# Altium PCB PCB.PcbDoc
Units mil, origin at the board's own origin, x right, y up, seen from the top; angles counter-clockwise.
Board outline 5065 x 3485 mil, 2 copper layers (Top Layer, Bottom Layer); 32 components, 28 nets, 114 pads, 0 vias.
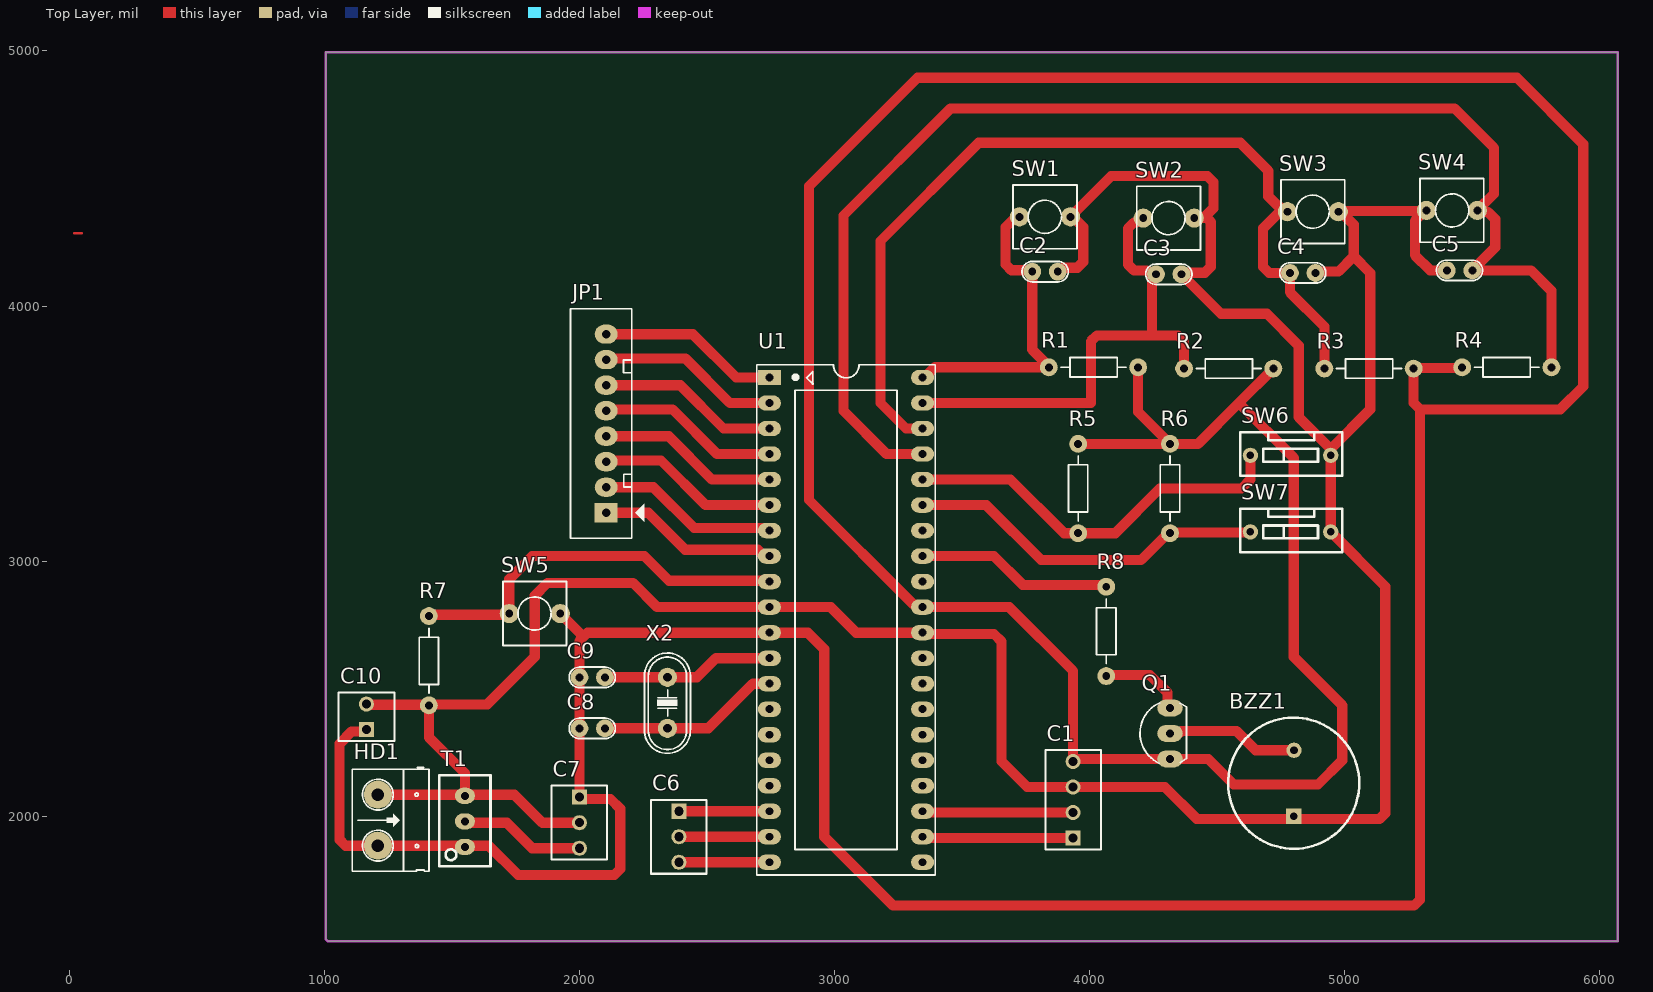
[diagram p0: Top Layer view]
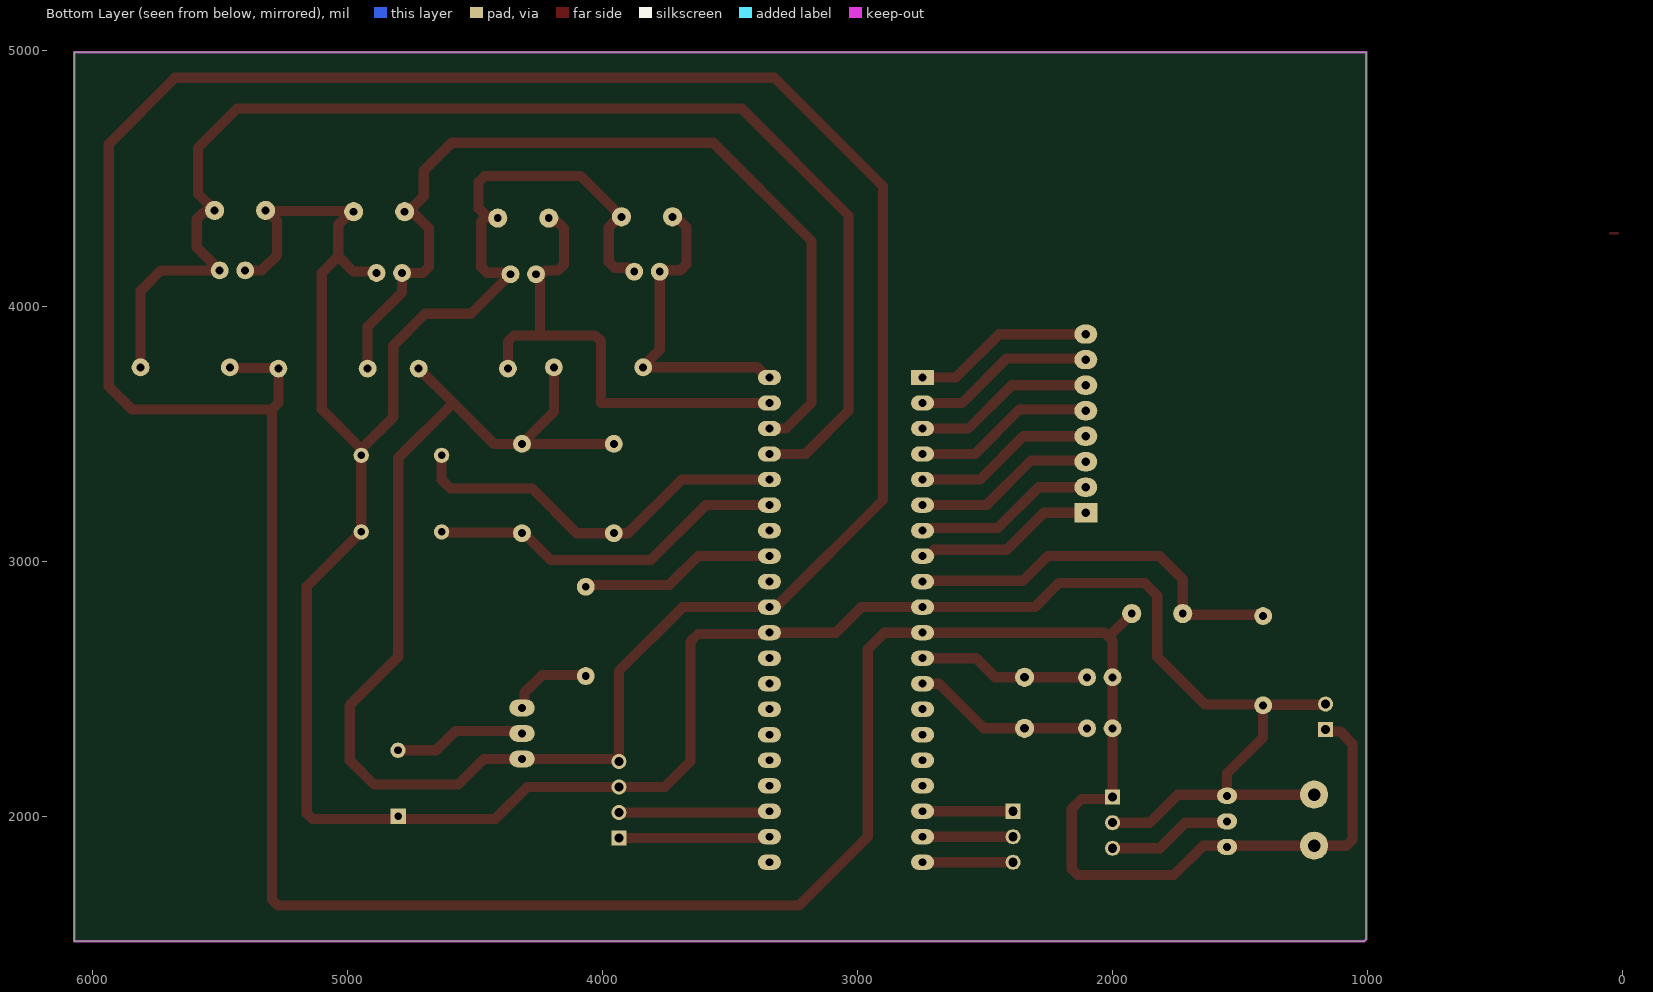
[diagram p1: Bottom Layer view, seen from below]
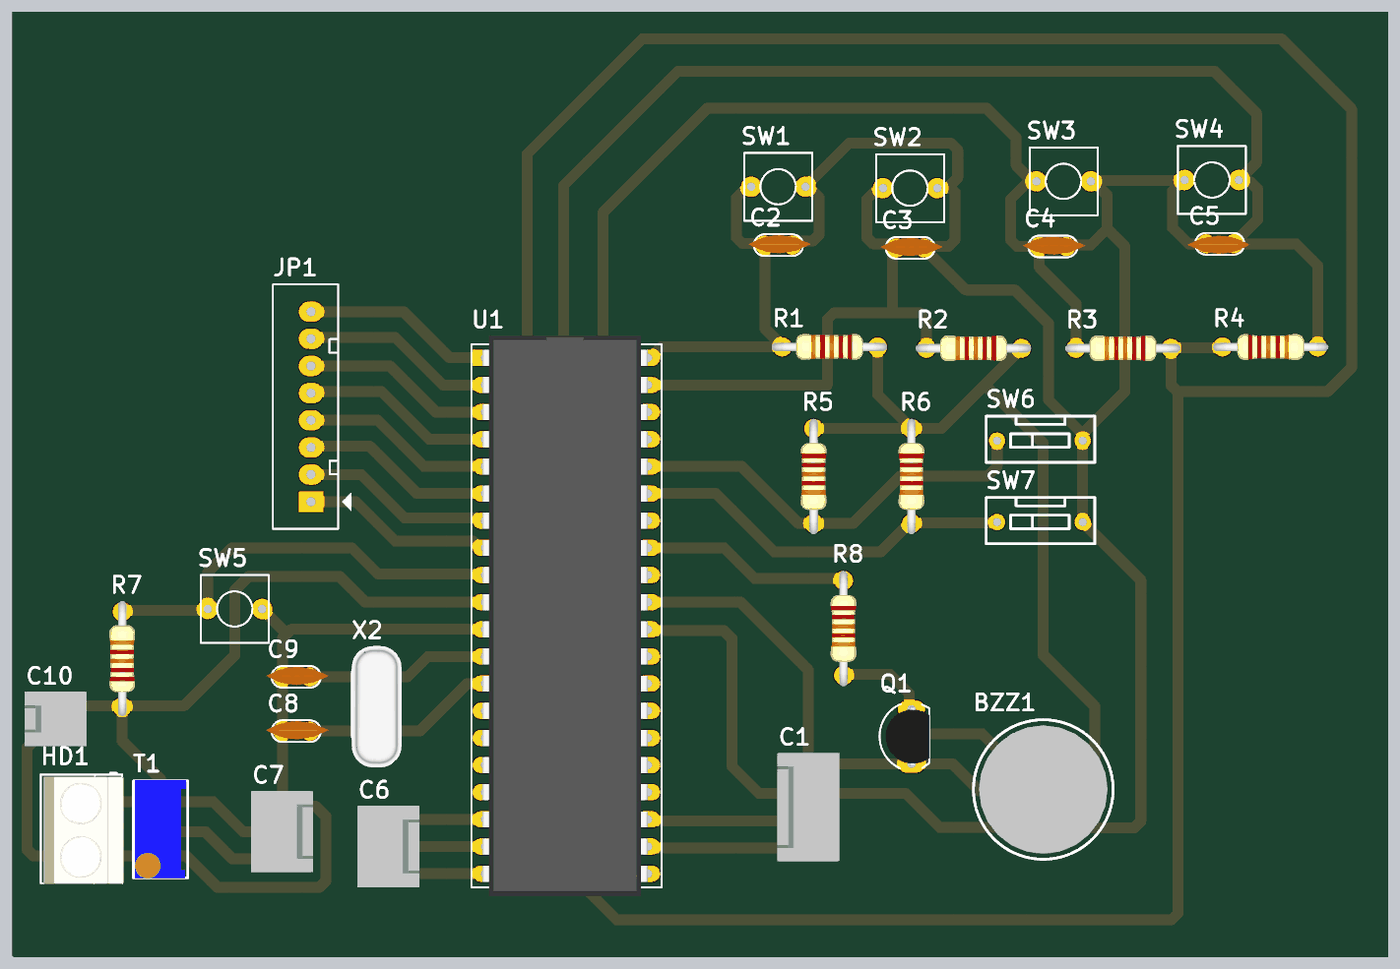
[diagram p2: 3D render of the assembled board from above, using the file's embedded part models]

## Layer stack, top to bottom
Top Solder: solder mask 0.4, Solder Resist, Dk 3.5
Top Layer: signal copper 1.4
Dielectric 1: dielectric 12.6, FR-4, Dk 4.8
Bottom Layer: signal copper 1.4
Bottom Solder: solder mask 0.4, Solder Resist, Dk 3.5

## Board outline
1015,1510 1005,1520 1005,4980 1005,4995 6070,4995 6070,1510

## Design rules (kind name [scope] priority, off if disabled: settings)
Clearance [All] p1: gap=0 ignorepadtopadclearanceinfootprint=FALSE
PolygonConnect [All] p1: connectstyle=Relief reliefconductorwidth=10 reliefentries=4 polygonreliefangle="90 Angle" airgapwidth=10
RoutingVias [All] p1: holewidth=28 width=50 viastyle="Through Hole" minholewidth=28 minwidth=50 maxholewidth=28 maxwidth=50
SolderMaskExpansion [All] p1: expansion=4 istentingtop=FALSE
Width [All] p1: maxlimit=40 minlimit=40 preferedwidth=40 checkconnectedcopper=TRUE
30 further rules are at their usual default settings.

## Components (designator, comment, footprint, x,y, rotation, side; value= is the part's Value field where it differs from the comment)
BZZ1 "Buzzer" "buzzer 5V" 4800,2130 r90 top
C1 "module RTC" HDR4 3935,1915 r90 top
C2 "100pF" CN1 3775,4135 r0 top
C3 "100pF" CN1 4260,4125 r0 top
C4 "100pF" CN1 4785,4130 r0 top
C5 "100pF" CN1 5500,4140 r180 top
C6 "4_6" HDR3 2390,2020 r270 top
C7 "1_3" HDR3 2000,2075 r270 top
C8 "100pF" CN1 2000,2345 r0 top
C9 "100pF" CN1 2000,2545 r0 top
C10 "BLA BLK" HDR2 1165,2340 r90 top
HD1 "source" HED2 1210,2085 r270 top value="Header 2"
JP1 "JP8" Header8 2105,3190 r90 top value="Connector 8"
Q1 "C458" TO92-123 4315,2325 r90 top value=C1815
R1 "Res1" R1/4W 3840,3760 r0 top value=10K
R2 "Res1" R1/4W 4370,3755 r0 top value=10K
R3 "Res1" R1/4W 4920,3755 r0 top value=10K
R4 "Res1" R1/4W 5810,3760 r180 top value=10K
R5 "Res1" R1/4W 3955,3110 r90 top value=10K
R6 "Res1" R1/4W 4315,3110 r90 top value=10K
R7 "Res1" R1/4W 1410,2785 r270 top value=10K
R8 "Res1" R1/4W 4065,2550 r90 top value=10K
SW1 "SW" SW2 3725,4350 r0 top value="SW chip 2 pin"
SW2 "SW" SW2 4210,4345 r0 top value="SW chip 2 pin"
SW3 "SW" SW2 4775,4370 r0 top value="SW chip 2 pin"
SW4 "SW" SW2 5520,4375 r180 top value="SW chip 2 pin"
SW5 "SW" SW2 1725,2795 r0 top value="SW chip 2 pin"
SW6 "1P" "SWITCH BIT 1" 4630,3415 r0 top value="Switch Số 1P ( Công Tắc Bit 1P) Màu Đỏ"
SW7 "1P" "SWITCH BIT 1" 4630,3115 r0 top value="Switch Số 1P ( Công Tắc Bit 1P) Màu Đỏ"
T1 "10K" RVAR10K 1551.47,1980.6 r90 top
U1 "ATmega32A-PU" DIP40/W0.6 2745,3720 r270 top
X2 "12Mhz" XT2 2345,2445 r90 top value=4Mhz

## Footprints (in the part's own frame and the unit in brackets; to place one, negate y for a bottom-side part, rotate by r counter-clockwise, add the part's x,y. Pads: shape width x height; smd on the part's side, far side on the other; paste and mask are expansions set on the pad)
"buzzer 5V" [mil]
  rect 60x60 hole 30: 1(-130,0)
  round 60 hole 30: 2(129,-1)
  silkscreen extent -257,-257 257,257, body extent -236,-236 236,236, height 345
CN1 [mil]
  round 70 hole 31: 1(0,0) 2(100,0)
  silkscreen extent -40,-40 141,40, body extent -60,-30 170,37, height 265
DIP40/W0.6 [mil] "40 PIN, W 600mil, Pin to pin 100mil"
  rect 60x90 hole 31: 1(0,0)
  oval 60x90 hole 31: 2(100,0) 3(200,0) 4(300,0) 5(400,0) 6(500,0) 7(600,0) 8(700,0) 9(800,0) 10(900,0) 11(1000,0) 12(1100,0) 13(1200,0) 14(1300,0) 15(1400,0) 16(1500,0) 17(1600,0) 18(1700,0) 19(1800,0) 20(1900,0) 21(1900,600) 22(1800,600) 23(1700,600) 24(1600,600) 25(1500,600) 26(1400,600) 27(1300,600) 28(1200,600) 29(1100,600) 30(1000,600) 31(900,600) 32(800,600) 33(700,600) 34(600,600) 35(500,600) 36(400,600) 37(300,600) 38(200,600) 39(100,600) 40(0,600)
  silkscreen extent -50,-50 1950,650, body extent -82,-10 1982,600, height 224
HDR2 [mm] "Connector; Header; 2 Position"
  rect 1.5x1.5 hole 0.9: 1(0,0)
  round 1.5 hole 0.9: 2(2.54,0)
  silkscreen extent -1.14,-2.79 3.68,2.77, body extent -1.27,-2.92 3.81,2.88, height 11.72
HDR3 [mm] "Connector; Header; 3 Position"
  rect 1.5x1.5 hole 0.9: 1(0,0)
  round 1.5 hole 0.9: 2(2.54,0) 3(5.08,0)
  silkscreen extent -1.14,-2.79 6.22,2.74, body extent -1.27,-2.92 6.35,2.88, height 11.72
HDR4 [mm] "Connector; Header; 4 Position"
  rect 1.5x1.5 hole 0.9: 1(0,0)
  round 1.5 hole 0.9: 2(2.54,0) 3(5.08,0) 4(7.62,0)
  silkscreen extent -1.14,-2.79 8.76,2.74, body extent -1.27,-2.92 8.89,2.88, height 11.72
Header8 [mil] "CON8"
  rect 75x90 hole 34: 1(0,0)
  oval 75x90 hole 34: 2(100,0) 3(200,0) 4(300,0) 5(400,0) 6(500,0) 7(600,0) 8(700,0)
  silkscreen extent -100,-150 800,140
HED2 [mil] "Header 2, 2 pin, hight 300mil, Pin to Pin 200, Colour Green"
  round 110 hole 50: 1(0,0) 2(200,0)
  silkscreen extent -106,-100 300,200, body extent -92,-90 302,205, height 394
R1/4W [mil] "R 1/4W, 2 Pin, 350mil"
  round 70 hole 31: 1(0,0) 2(350,0)
  silkscreen extent 48,-38 302,38, body extent -40,-47 386,47, height 111
RVAR10K [mm] "Bien tro vi chinh"
  oval 1.6x2 hole 0.8: 1(-2.54,0) 2(0,0) 3(2.54,0)
  silkscreen extent -4.47,-2.54 4.6,2.54, body extent -4.54,-2.4 4.66,2.4, height 12.02
SW2 [mil] "SW button 2pin, 250x 250 mil"
  round 75 hole 31: 1(0,0) 2(200,0)
  silkscreen extent -25,-125 225,125
"SWITCH BIT 1" [mil]
  round 60 hole 30: 1(0,0) 2(315,0)
  silkscreen extent -40,-80 360,90
TO92-123 [mil] "TO-92"
  oval 66x100 hole 32: 1(-100,0) 2(0,0) 3(100,0)
  silkscreen extent -117,-65 120,118, body extent -109,-66 109,95, height 245
XT2 [mil] "Footpin for Crystal 2 pin"
  round 75 hole 34: 1(-100,0) 2(100,0)
  silkscreen extent -198,-90 195,90, body extent -233,-93 213,90, height 138

## Part data
C1: library part Header4, "Header IDC, 4 x 1 Pin Vertical 2.54mm Pitch (Non-Boxed, Male)", Manufacturer="W¨¹rth Elektronik eiSos GmbH", partNo=613002143121, ComponentLink1 Description=Manufacturer, ComponentLink1URL=http://www.we-online.com, ComponentLink2 Description=Datasheet, ComponentLink2URL=http://katalog.we-online.de/em/datasheet/6130xx143121.pdf, Created by="Karrer Zheng", Created Date="29 March 2013", NoPins=02
C2 C3 C4 C5 C8 C9: library part CN1, "Cap np  1pF - 472pF"
C6 C7: library part Header3, "Header IDC, 3 x 1 Pin Vertical 2.54mm Pitch (Non-Boxed, Male)", Manufacturer="W¨¹rth Elektronik eiSos GmbH", partNo=613002143121, ComponentLink1 Description=Manufacturer, ComponentLink1URL=http://www.we-online.com, ComponentLink2 Description=Datasheet, ComponentLink2URL=http://katalog.we-online.de/em/datasheet/6130xx143121.pdf, Created by="Karrer Zheng", Created Date="29 March 2013", NoPins=02
C10: library part Header2, "Header IDC, 2 x 1 Pin Vertical 2.54mm Pitch (Non-Boxed, Male)", Manufacturer="W¨¹rth Elektronik eiSos GmbH", partNo=613002143121, ComponentLink1 Description=Manufacturer, ComponentLink1URL=http://www.we-online.com, ComponentLink2 Description=Datasheet, ComponentLink2URL=http://katalog.we-online.de/em/datasheet/6130xx143121.pdf, Created by="Karrer Zheng", Created Date="29 March 2013", NoPins=02
HD1: library part "Header 2", "Header 2 (Green)"
JP1: library part Header8, "Connector 8"
Q1: "NPN 600mW, ECB"
R1 R2 R3 R4 R5 R6 R7 R8: library part Res1_1, "Resistor", Manufacturer="Generic Components", Class=Passive, Published=08/06/2000, Publisher="Altium Hobart Technology Centre", SubClass=Resistor
SW1 SW2 SW3 SW4 SW5: library part SW2, "Switch button 2 pin"
SW6 SW7: library part "Cong Tac Bits 1P", "Cắm", Chung_Loai=Cắm, Don_Vi=Con, Ma_Hang=MH000964
T1: library part "Bien Tro Tinh Chinh 10K", "Cắm", Chung_Loai=Cắm, Don_Vi=Con, Ma_Hang=MH003232, Ten_Linh_Kien="Biến Trở VR 103-10K 3296W"
U1: "8-Bit AVR Microcontroller with 32K Bytes of In-System Programmable Flash Memory", Supplier Part Number 1=ATMEGA32-16PC-ND, Code_JEDEC=MS-011-AC, ComponentLink1Description=Datasheet, ComponentLink1URL=http://www.atmel.com/dyn/resources/prod_documents/doc2503.pdf, ComponentLink2Description="Atmel.com Home", ComponentLink2URL=http://www.atmel.com, DatasheetVersion=2503C-AVR-10/02, PackageDescription="40-lead (0.600\"/15.24mm Wide) Plastic Dual Inline Package (PDIP)", PackageReference=40P6, PackageVersion="revB, Sep-2001", Published=17-Sep-2003, Publisher="Altium Limited", Supplier 1=Digi-Key, Supplier 2=Mouser, Supplier Part Number 2=556-ATMEGA32-16PC
X2: library part XT2, "Crystal, 32.768 KHz, -40 to 85 degC, 3.2 x 1.5 x 0.9 mm SMD"

## Nets (pads, with @x,y where several pads share a name; then routed paths per layer and width w, separated by ;. In a path a pad name is that pad's centre, name@x,y a point inside that pad or via, vN(x,y) a via of type N, cw(c..) or ccw(c..) an arc to the next point about the centre after c; other vN are vias at no path point)
GND: C1.4 C7.1 C8.1 C9.1 C10.1 HD1.2 Q1.1 R1.2 R2.2 R3.2 R4.2 R5.2 R6.2 SW5.2 T1.1 U1.11 U1.31 | length 21112.5
  Top Layer w40: C10.1 1158.05,2333.05 1108.05,2333.05 1060,2285 1060,1908.43 1083.43,1885 1547.07,1885 T1.1 ; T1.1@1535,1885 1645,1885 1760,1770 2136.57,1770 2160,1793.43 2160,2030 2121.95,2068.05 2006.95,2068.05 C7.1 C8.1 C9.1 2000,2687.83 2016.08,2703.92 ; SW5.2 2016.08,2703.92 ; R5.2 R6.2 ; R1.2 4190,3585 R6.2 ; R2.2 4585,3620 ; R4.2 5457.5,3757.5 5272.5,3757.5 R3.2 5270,3620 5295,3595 ; 2016.08,2703.92 2032.17,2720 U1.11 2895,2720 2960,2655 2960,1920 3230,1650 5271.57,1650 5295,1673.43 5295,3595 ; R6.2 4425,3460 4585,3620 ; 4585,3620 4800,3405 4800,2625 4990,2435 4990,2220 4895,2125 4565,2125 4465,2225 Q1.1 3950.16,2225 3940.16,2215 C1.4 3935,2570 3685,2820 U1.31 3324.59,2820 3314.59,2830 3310,2830 2900,3240 2900,4470 3325,4895 5675,4895 5935,4635 5935,3685 5845,3595 5295,3595
NetBZZ1_2: BZZ1.2 Q1.2 | length 521.6
  Top Layer w40: Q1.2 4319.97,2329.97 4355.36,2329.97 4360.38,2335 4575,2335 4651,2259 BZZ1.2
NetC1_1: C1.1 U1.22 | length 590
  Top Layer w40: U1.22@3345,1915 C1.1
NetC1_2: C1.2 U1.23 | length 586
  Top Layer w40: U1.23@3350,2015 3351.17,2016.17 3377.97,2016.17 3379.14,2015 C1.2
NetC2_1: C2.1 R1.1 SW1.1 U1.40 | length 1248.1
  Top Layer w40: U1.40 3354.59,3720 3370,3735.41 3370,3736.57 3393.43,3760 R1.1 3840,3764.35 3775,3829.35 C2.1 3769.26,4140.74 3693.43,4140.74 3670,4164.17 3670,4309.07 3704.23,4343.3 3718.3,4343.3 SW1.1
NetC3_1: C3.1 R2.1 SW2.1 U1.39 | length 1982.3
  Top Layer w40: U1.39 4005,3620 4005,3861.57 4028.43,3885 4245,3885 ; SW2.1 4200.53,4345 4183.03,4327.5 4173.43,4327.5 4150,4304.07 4150,4163.43 4173.43,4140 4223.79,4140 4233.05,4130.74 4254.26,4130.74 C3.1 4260,4116.88 4245,4101.88 4245,3885 ; R2.1 4370,3861.57 4346.57,3885 4245,3885
NetC4_1: C4.1 R3.1 SW3.1 U1.38 | length 3581.8
  Top Layer w40: U1.38 3280,3520 3180,3620 3180,4255 3565,4640 4590,4640 4700,4530 4700,4430 4742.5,4387.5 4748.03,4387.5 4760,4375.53 SW3.1@4760,4370 ; SW3.1 4745,4370 4680,4305 4680,4153.43 4703.43,4130 C4.1 ; C4.1@4785,4138.12 C4.1 ; R3.1 4920,3920 4785,4055 C4.1
NetC5_1: C5.1 R4.1 SW4.1 U1.37 | length 5170.6
  Top Layer w40: U1.37 3205,3420 3035,3590 3035,4355 3455,4775 5430,4775 5585,4620 5585,4440 SW4.1 5526.7,4368.3 5561.95,4368.3 5590,4340.25 5590,4230 C5.1 5730,4140 5810,4060 R4.1
NetC6_1: C6.1 U1.18 | length 355
  Top Layer w40: C6.1 U1.18
NetC6_2: C6.2 U1.19 | length 355
  Top Layer w40: C6.2 U1.19
NetC6_3: C6.3 U1.20 | length 355
  Top Layer w40: C6.3 U1.20
NetC7_3: C7.3 T1.2 | length 510.6
  Top Layer w40: T1.2@1535,1985 1539.4,1980.6 1563.53,1980.6 1569.13,1975 1715,1975 1815,1875 C7.3
NetC8_2: C8.2 U1.13 X2.1 | length 717.5
  Top Layer w40: C8.2 X2.1 2505,2345 2680,2520 U1.13
NetC9_2: C9.2 U1.12 X2.2 | length 676.1
  Top Layer w40: C9.2 X2.2 2460,2545 2535,2620 U1.12
NetJP1_1: JP1.1 U1.8 | length 710.4
  Top Layer w40: JP1.1 2270,3190 2415,3045 2699.59,3045 2724.59,3020 U1.8
NetJP1_2: JP1.2 U1.7 | length 710.4
  Top Layer w40: JP1.2 2290,3290 2450,3130 2714.59,3130 2724.59,3120 U1.7
NetJP1_3: JP1.3 U1.6 | length 712.5
  Top Layer w40: JP1.3@2105,3395 2320,3395 2495,3220 U1.6
NetJP1_4: JP1.4 U1.5 | length 713
  Top Layer w40: JP1.4@2102.41,3490 2350,3490 2520,3320 U1.5
NetJP1_5: JP1.5 U1.4 | length 712.5
  Top Layer w40: JP1.5@2105,3595 2365,3595 2540,3420 U1.4
NetJP1_6: JP1.6 U1.3 | length 710.4
  Top Layer w40: JP1.6 2395,3690 2565,3520 U1.3
NetJP1_7: JP1.7 U1.2 | length 712.5
  Top Layer w40: JP1.7@2105,3795 2415,3795 2590,3620 U1.2
NetJP1_8: JP1.8 U1.1 | length 710.4
  Top Layer w40: JP1.8 2445,3890 2615,3720 U1.1
NetQ1_3: Q1.3 R8.1 | length 332.8
  Top Layer w40: R8.1@4065,2554.26 4235.74,2554.26 4305.74,2484.26 4305.74,2434.26 Q1.3
NetR5_1: R5.1 SW6.1 U1.36 | length 1554
  Top Layer w40: U1.36 3690,3320 3900,3110 R5.1 4100,3110 4275,3285 4595,3285 4630,3320 SW6.1
NetR6_1: R6.1 SW7.1 U1.35 | length 1419.6
  Top Layer w40: U1.35 3595,3220 3810,3005 4201.88,3005 4306.88,3110 R6.1 4317.5,3112.5 4627.5,3112.5 SW7.1
NetR7_1: R7.1 SW5.1 U1.9 | length 1550.8
  Top Layer w40: R7.1 1415,2790 SW5.1@1725,2790 ; SW5.1 1725,2930 1815,3020 2255,3020 2351.17,2923.83 2741.17,2923.83 U1.9
NetR8_2: R8.2 U1.33 | length 768.8
  Top Layer w40: U1.33 3625,3020 3737.82,2907.18 4036.6,2907.18 4038.05,2905.74 4061.44,2905.74 R8.2@4065,2902.18
VCC: BZZ1.1 C1.3 C2.2 C3.2 C4.2 C5.2 C7.2 C10.2 HD1.1 R7.2 SW1.2 SW2.2 SW3.2 SW4.2 SW6.2 SW7.2 T1.3 U1.10 U1.30 | length 12198.1
  Top Layer w40: C10.2 1167.5,2437.5 1407.5,2437.5 R7.2 1410,2310 1551.47,2168.53 T1.3 1547.07,2085 HD1.1 ; R7.2@1413.83,2438.83 1638.83,2438.83 1825,2625 1825,2865 1875,2915 2210,2915 2305,2820 U1.10 2985,2820 3085,2720 U1.30 ; T1.3@1551.47,2085 1745,2085 1855,1975 C7.2 ; U1.30@3345,2715 3625,2715 3655,2685 3655,2215 3755,2115 C1.3 4295,2115 4420,1990 4790,1990 BZZ1.1 4810,1990 4832.46,1990 4833.43,1989.03 5135.6,1989.03 5159.03,2012.46 5159.03,2900.97 SW7.2 SW6.2 SW6.2@4945,3440 ; C2.2 3883.12,4135 3898.12,4150 3951.57,4150 3975,4173.43 3975,4309.07 3934.07,4350 SW1.2 4085,4510 4461.57,4510 4485,4486.57 4485,4383.43 4453.27,4351.7 ; SW2.2 4460,4345 4475,4330 4475,4154.17 4451.57,4130.74 4365.74,4130.74 C3.2 4515,3970 4695,3970 4820,3845 4820,3565 SW6.2@4945,3440 ; C4.2 4890.74,4135.74 4975.74,4135.74 5035,4195 ; SW4.2 5317.5,4372.5 SW4.2@5304.41,4372.5 ; C5.2 5335,4140 5275,4200 5275,4334.07 5306.53,4365.6 5306.53,4370.37 SW4.2@5304.41,4372.5 ; SW6.2@4945,3440 5100,3595 5100,4130 5035,4195 ; 5035,4195 5035,4319.47 4984.47,4370 SW3.2 4977.5,4372.5 SW4.2@5304.41,4372.5
  Top Layer w50: R7.2 R7.2@1413.83,2438.83
pads on no net: U1.14 U1.15 U1.16 U1.17 U1.21 U1.24 U1.25 U1.26 U1.27 U1.28 U1.29 U1.32 U1.34
copper on no net: | length 30
  Top Layer w10: 20,4285 50,4285

## Keep-outs
Keep-Out Layer:
  the board outline again, w10